# Altium PCB Tray2.PcbDoc (part 1 of 6)
Units mil, origin at the board's own origin, x right, y up, seen from the top; angles counter-clockwise.
Board outline 6000 x 4000 mil, 2 copper layers (Top Layer, Bottom Layer); 418 components, 415 nets, 1799 pads, 870 vias.
Unrouted connection lines stored in the file: 363.
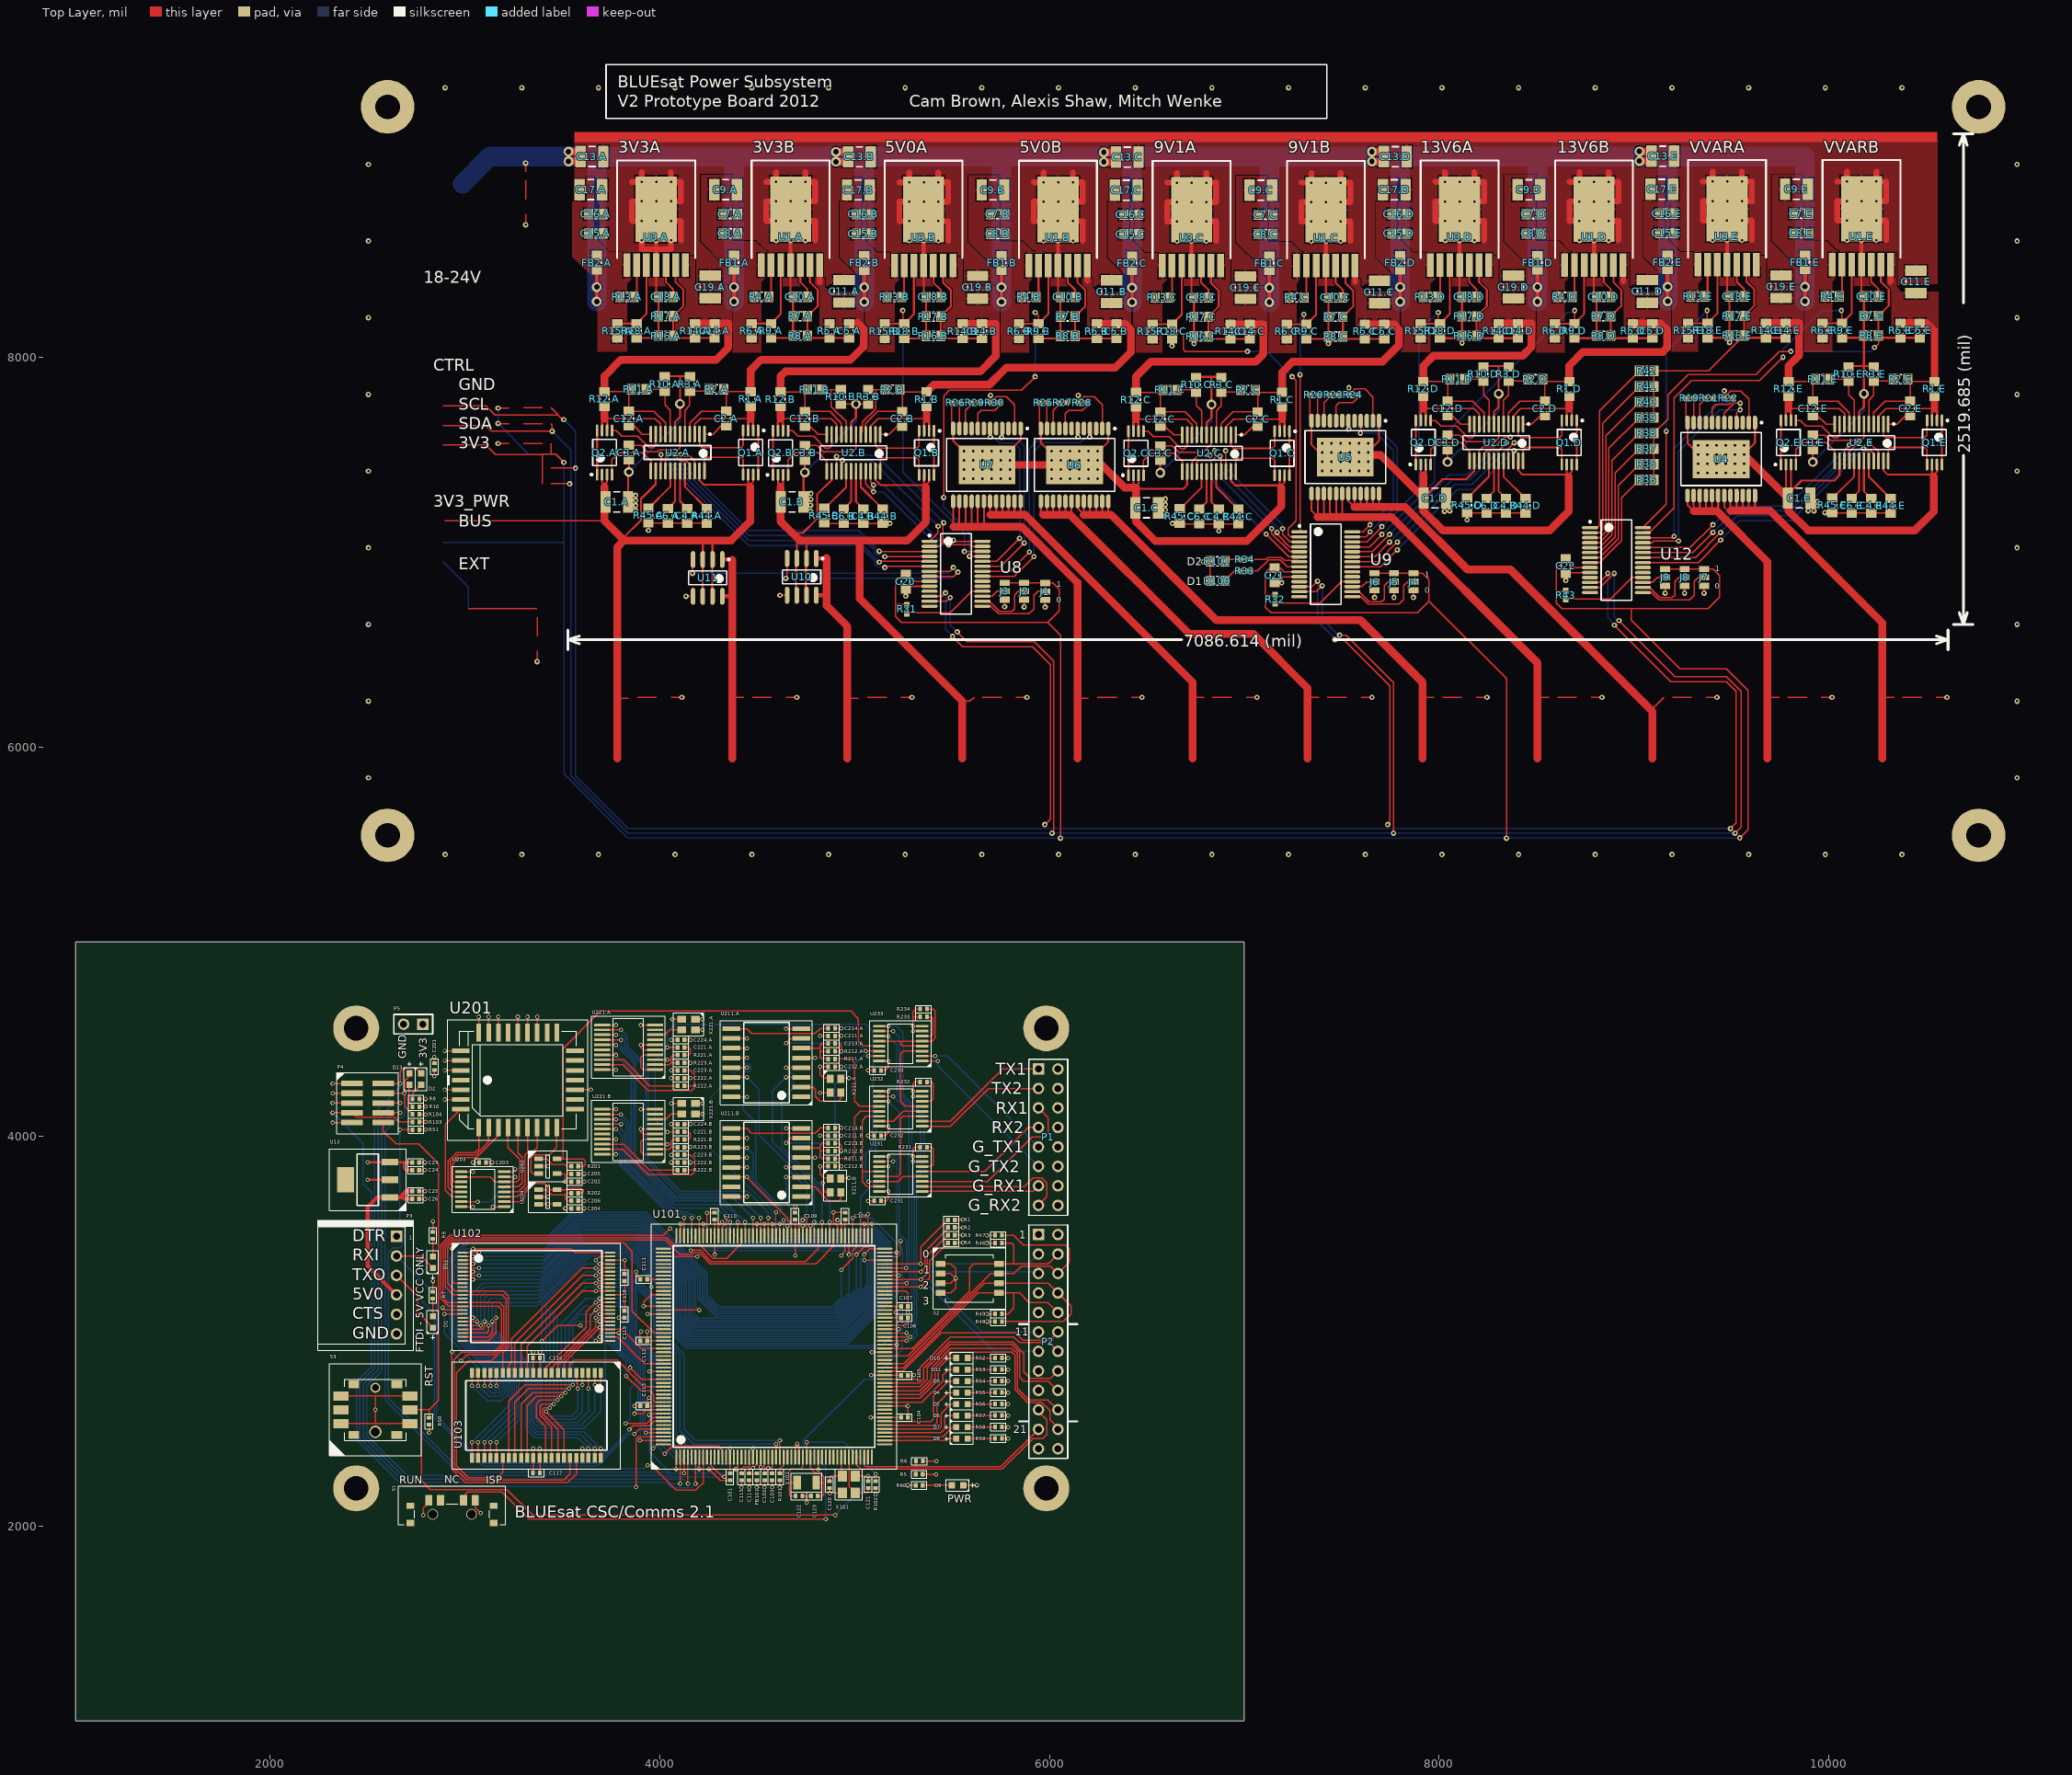
[diagram p0: Top Layer view]
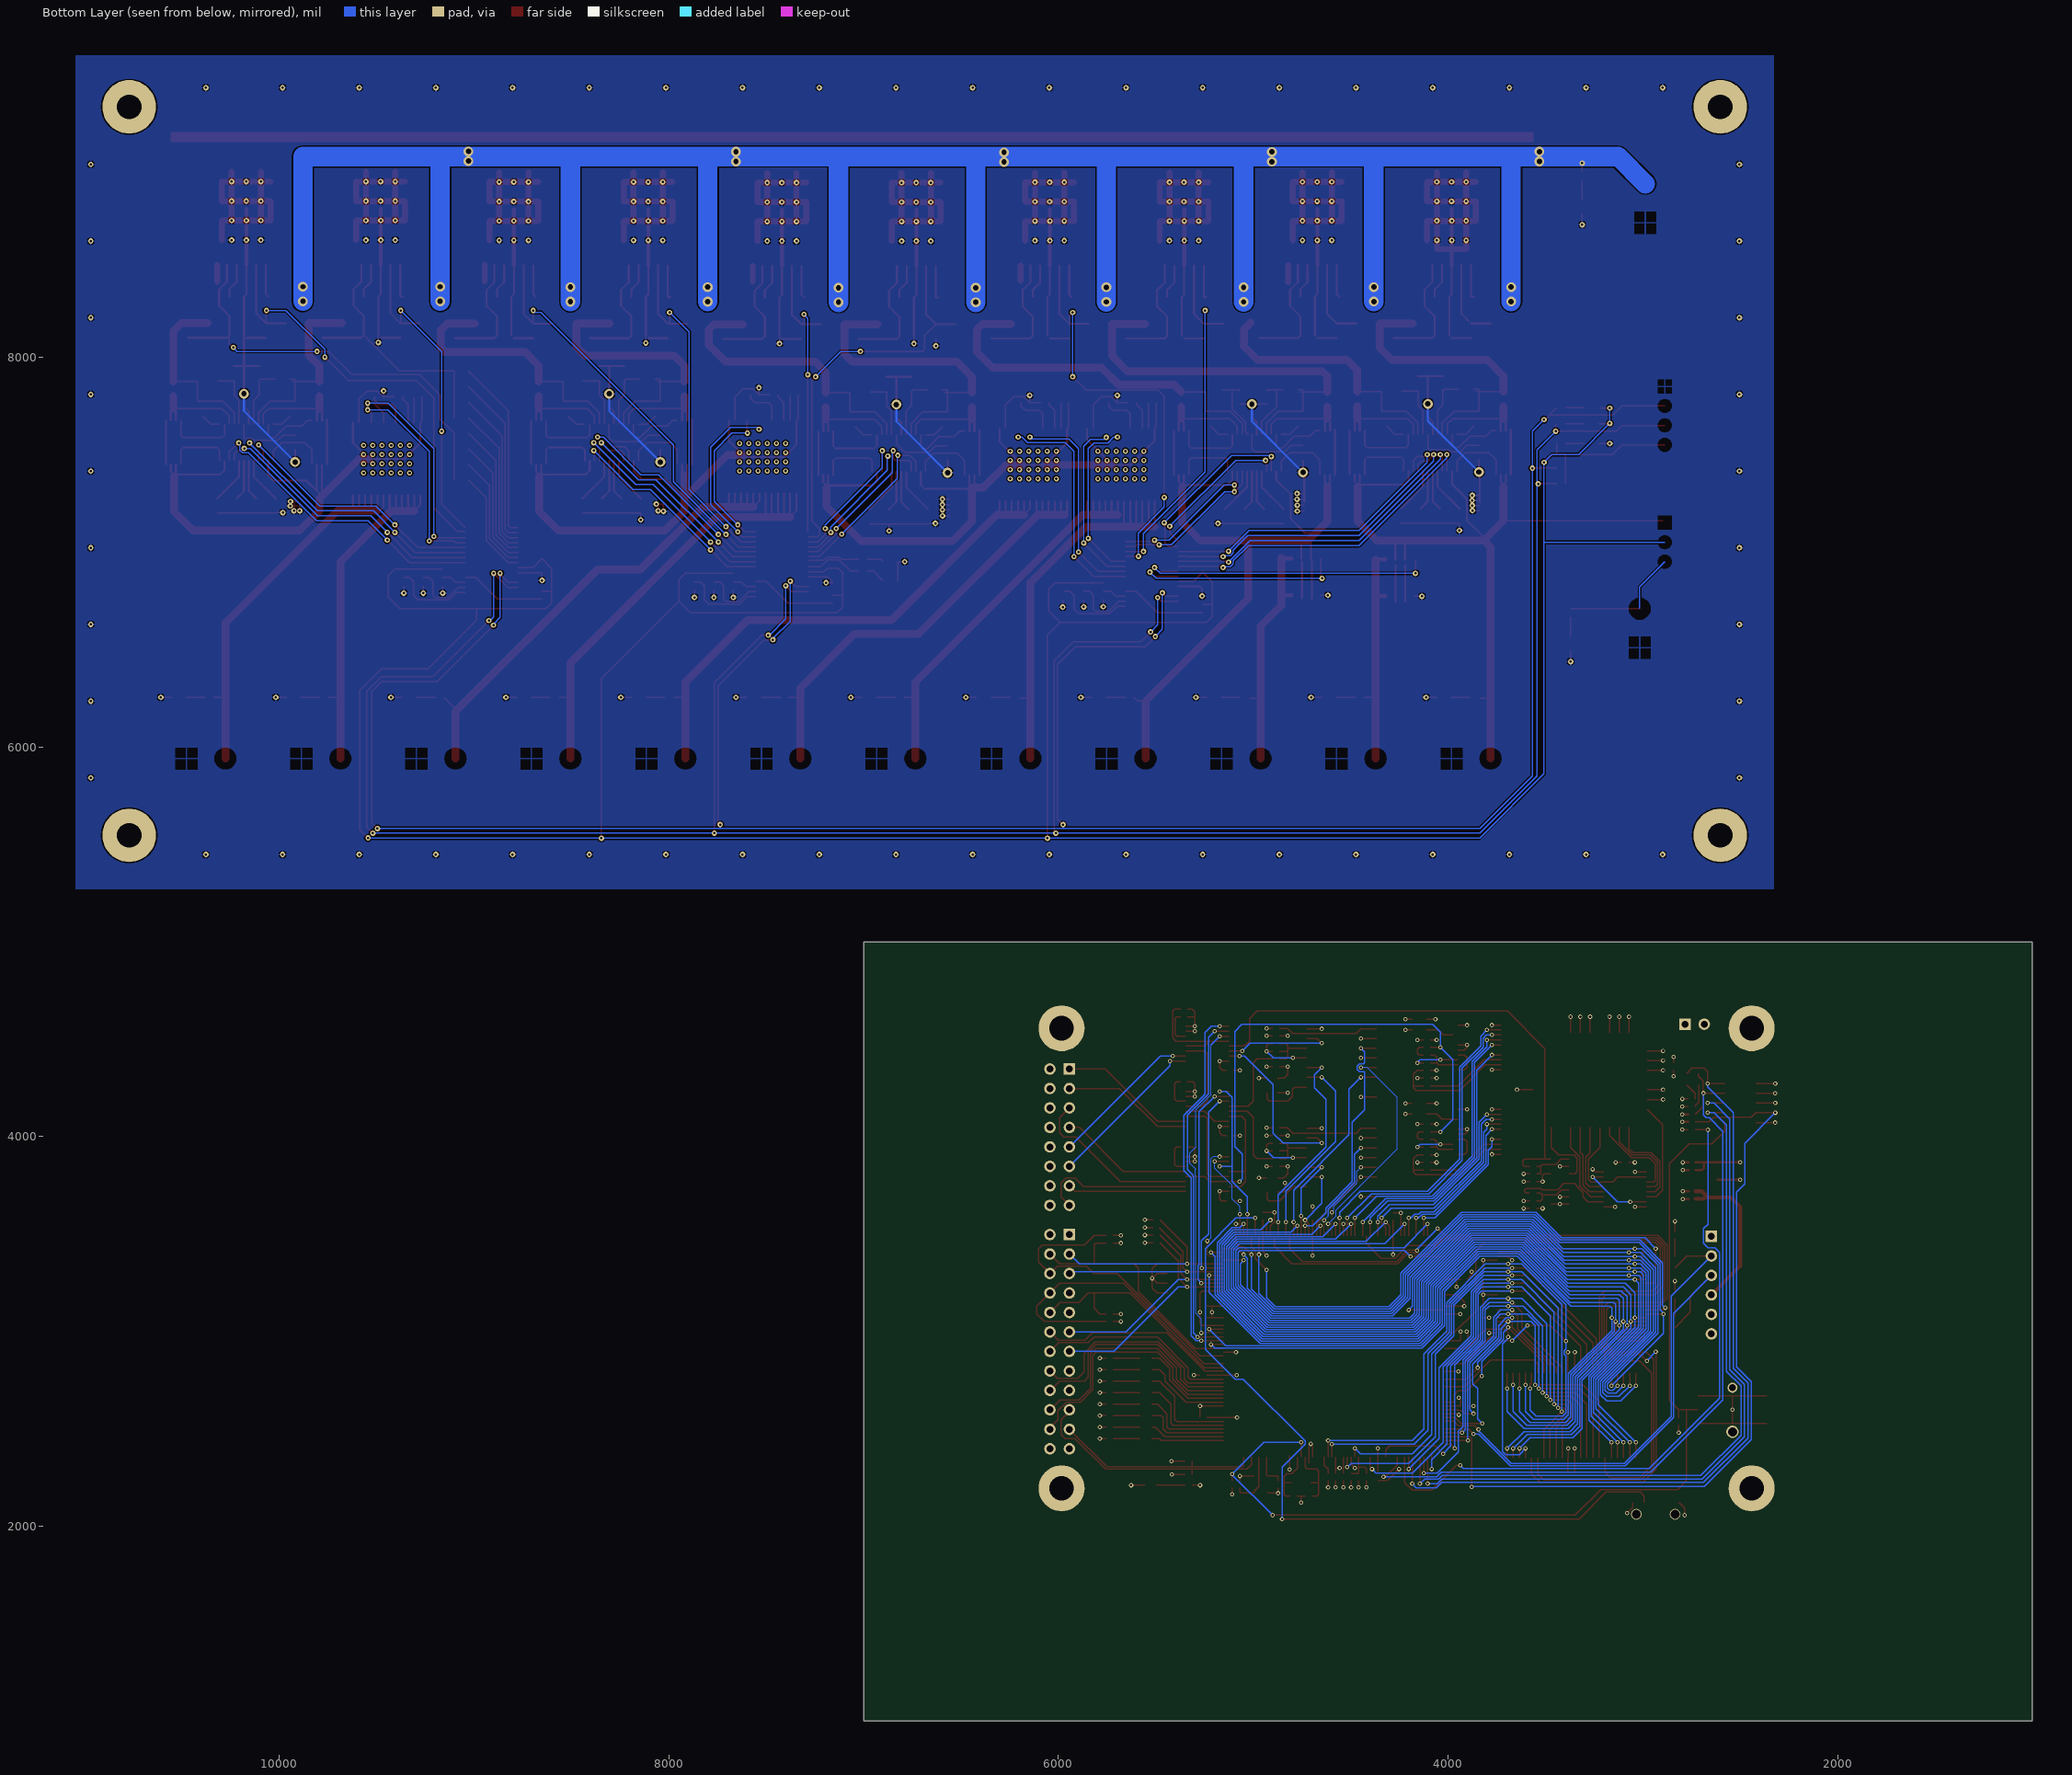
[diagram p1: Bottom Layer view, seen from below]

## Layer stack, top to bottom
Top Layer: signal copper 1.4
Dielectric: dielectric 12.6, FR-4, Dk 4.8
Bottom Layer: signal copper 1.4

## Board outline
1000,1000 7000,1000 7000,5000 1000,5000

## Design rules (kind name [scope] priority, off if disabled: settings)
Clearance [All] p1: gap=10
PolygonConnect [All] p1: connectstyle=Relief reliefconductorwidth=10 reliefentries=4 polygonreliefangle="90 Angle" airgapwidth=10
RoutingVias [All] p1: holewidth=28 width=50 viastyle="Through Hole" minholewidth=28 minwidth=50 maxholewidth=28 maxwidth=50
SilkscreenOverComponentPads [All] p1: minsilkscreentomaskgap=10
SolderMaskExpansion [All] p1: expansion=4
Width [All] p1: maxlimit=10 minlimit=10 preferedwidth=10
27 further rules are at their usual default settings.

## Classes and differential pairs
channel class Tray2_Power_RedundantReg: 3V3 5V0 9V1 13V6 VVAR
channel class Tray2_Comms_DTMF: DTMF1 DTMF2
channel class Tray2_Comms_AFSK: AFSK1 AFSK2
net class LED[0..7]: LED0 LED1 LED2 LED3 LED4 LED5 LED6 LED7
net class EXT[0..9]: EXT0 EXT1 EXT2 EXT3 EXT4 EXT5 EXT6 EXT7 EXT8 EXT9
net class D[0..15]: D0 D1 D2 D3 D4 D5 D6 D7 D8 D9 D10 D11 D12 D13 D14 D15
net class CONTROL.SWC[0..7]: CONTROL.SWC0 CONTROL.SWC1 CONTROL.SWC2 CONTROL.SWC3 CONTROL.SWC4 CONTROL.SWC5 CONTROL.SWC6 CONTROL.SWC7
net class CONTROL.DTMF2.Q[1..4]: CONTROL.DTMF2.Q1 CONTROL.DTMF2.Q2 CONTROL.DTMF2.Q3 CONTROL.DTMF2.Q4
net class CONTROL.DTMF1.Q[1..4]: CONTROL.DTMF1.Q1 CONTROL.DTMF1.Q2 CONTROL.DTMF1.Q3 CONTROL.DTMF1.Q4
net class ADDRESS[0..7]: ADDRESS0 ADDRESS1 ADDRESS2 ADDRESS3 ADDRESS4 ADDRESS5 ADDRESS6 ADDRESS7
net class A[0..19]: A0 A1 A2 A3 A4 A5 A6 A7 A8 A9 A10 A11 A12 A13 A14 A15 A16 A17 A18 A19
component class VVAR: C1.E C2.E C3.E C4.E C5.E C6.E C7.E C8.E C9.E C10.E C11.E C12.E C13.E C14.E C15.E C16.E C17.E C18.E C19.E FB1.E FB2.E Q1.E Q2.E R1.E R2.E R3.E R4.E R5.E R6.E R7.E R8.E R9.E R10.E R11.E R12.E R13.E R14.E R15.E R16.E R17.E R18.E R44.E R45.E U1.E U2.E U3.E
component class SwC: C231 C232 C233 R231 R232 R233 R234 U231 U232 U233
component class Regulation: C20 C21 C22 D100 D101 J1 J2 J3 J4 J5 J6 J7 J8 J9 R19 R20 R21 R22 R23 R24 R25 R26 R27 R28 R29 R30 R31 R32 R33 R34 R35 R36 R37 R38 R39 R40 R41 R42 R43 U4 U5 U6 U7 U8 U9 U10 U11 U12
component class DTMF2: C221.B C222.B C223.B C224.B R221.B R222.B R223.B U221.B X221.B
component class DTMF1: C221.A C222.A C223.A C224.A R221.A R222.A R223.A U221.A X221.A
component class "Connections Temp": C23 C24 C25 C26 D1 D2 D3 D4 D5 D6 D7 D8 D9 D10 D11 D12 D13 P1 P2 P3 P4 P5 R1 R2 R3 R4 R5 R6 R7 R8 R9 R10 R46 R47 R48 R49 R50 R51 R52 R53 R54 R55 R56 R57 R58 R59 R60 S1 S2 S3 U13
component class Beacon: C201 C202 C203 C204 C205 C206 R201 R202 U201 U202 U203 U204
component class ARM: C101 C102 C103 C104 C105 C106 C107 C108 C109 C110 C111 C112 C113 C114 C115 C116 C117 C118 C119 C120 C121 C122 C123 FB101 R101 R102 R103 R104 U101 U102 U103 X101 X102
component class AFSK2: C211.B C212.B C213.B C214.B R211.B R212.B U211.B X211.B
component class AFSK1: C211.A C212.A C213.A C214.A R211.A R212.A U211.A X211.A
component class 13V6: C1.D C2.D C3.D C4.D C5.D C6.D C7.D C8.D C9.D C10.D C11.D C12.D C13.D C14.D C15.D C16.D C17.D C18.D C19.D FB1.D FB2.D Q1.D Q2.D R1.D R2.D R3.D R4.D R5.D R6.D R7.D R8.D R9.D R10.D R11.D R12.D R13.D R14.D R15.D R16.D R17.D R18.D R44.D R45.D U1.D U2.D U3.D
component class 9V1: C1.C C2.C C3.C C4.C C5.C C6.C C7.C C8.C C9.C C10.C C11.C C12.C C13.C C14.C C15.C C16.C C17.C C18.C C19.C FB1.C FB2.C Q1.C Q2.C R1.C R2.C R3.C R4.C R5.C R6.C R7.C R8.C R9.C R10.C R11.C R12.C R13.C R14.C R15.C R16.C R17.C R18.C R44.C R45.C U1.C U2.C U3.C
component class 5V0: C1.B C2.B C3.B C4.B C5.B C6.B C7.B C8.B C9.B C10.B C11.B C12.B C13.B C14.B C15.B C16.B C17.B C18.B C19.B FB1.B FB2.B Q1.B Q2.B R1.B R2.B R3.B R4.B R5.B R6.B R7.B R8.B R9.B R10.B R11.B R12.B R13.B R14.B R15.B R16.B R17.B R18.B R44.B R45.B U1.B U2.B U3.B
component class 3V3: C1.A C2.A C3.A C4.A C5.A C6.A C7.A C8.A C9.A C10.A C11.A C12.A C13.A C14.A C15.A C16.A C17.A C18.A C19.A FB1.A FB2.A Q1.A Q2.A R1.A R2.A R3.A R4.A R5.A R6.A R7.A R8.A R9.A R10.A R11.A R12.A R13.A R14.A R15.A R16.A R17.A R18.A R44.A R45.A U1.A U2.A U3.A

## Components (designator, comment, footprint, x,y, rotation, side; value= is the part's Value field where it differs from the comment)
C1.A "COUT2" R1210M 3779.69,7258.7 r180 top (schematic designator C1)
C1.B "COUT2" R1210M 4679.69,7258.7 r180 top (schematic designator C1)
C1.C "COUT2" R1210M 6499.69,7228.7 r180 top (schematic designator C1)
C1.D "COUT2" R1210M 7979.69,7278.7 r180 top (schematic designator C1)
C1.E "COUT2" R1210M 9849.69,7278.7 r180 top (schematic designator C1)
C2.A "" R0805M 4341.18,7687.13 r270 top (schematic designator C2)
C2.B "" R0805M 5244.53,7685.63 r270 top (schematic designator C2)
C2.C "" R0805M 7069.76,7683.7 r270 top (schematic designator C2)
C2.D "" R0805M 8544.68,7738.7 r270 top (schematic designator C2)
C2.E "" R0805M 10419.76,7738.7 r270 top (schematic designator C2)
C3.A "" R0805M 3841.18,7512.13 r270 top (schematic designator C3)
C3.B "" R0805M 4744.53,7510.63 r270 top (schematic designator C3)
C3.C "" R0805M 6569.76,7508.7 r270 top (schematic designator C3)
C3.D "" R0805M 8044.68,7563.7 r270 top (schematic designator C3)
C3.E "" R0805M 9919.76,7563.7 r270 top (schematic designator C3)
C4.A "" R0805M 4141.18,7187.13 r90 top (schematic designator C4)
C4.B "" R0805M 5044.53,7185.63 r90 top (schematic designator C4)
C4.C "" R0805M 6869.76,7183.7 r90 top (schematic designator C4)
C4.D "" R0805M 8344.68,7238.7 r90 top (schematic designator C4)
C4.E "" R0805M 10219.76,7238.7 r90 top (schematic designator C4)
C5.A "CFF" R0805M 4971.18,8137.13 r90 top (schematic designator C5)
C5.B "CFF" R0805M 6344.53,8135.63 r90 top (schematic designator C5)
C5.C "CFF" R0805M 7719.76,8133.7 r90 top (schematic designator C5)
C5.D "CFF" R0805M 9096.14,8136.77 r90 top (schematic designator C5)
C5.E "CFF" R0805M 10469.76,8138.7 r90 top (schematic designator C5)
C6.A "" R0805M 4041.18,7187.13 r90 top (schematic designator C6)
C6.B "" R0805M 4944.53,7185.63 r90 top (schematic designator C6)
C6.C "" R0805M 6769.76,7183.7 r90 top (schematic designator C6)
C6.D "" R0805M 8244.68,7238.7 r90 top (schematic designator C6)
C6.E "" R0805M 10119.76,7238.7 r90 top (schematic designator C6)
C7.A "CIN" R0805M 4361.18,8737.13 r180 top (schematic designator C7)
C7.B "CIN" R0805M 5734.53,8735.63 r180 top (schematic designator C7)
C7.C "CIN" R0805M 7109.76,8733.7 r180 top (schematic designator C7)
C7.D "CIN" R0805M 8486.14,8736.77 r180 top (schematic designator C7)
C7.E "CIN" R0805M 9859.76,8738.7 r180 top (schematic designator C7)
C8.A "CIN" R0805M 4361.18,8637.13 r180 top (schematic designator C8)
C8.B "CIN" R0805M 5734.53,8635.63 r180 top (schematic designator C8)
C8.C "CIN" R0805M 7109.76,8633.7 r180 top (schematic designator C8)
C8.D "CIN" R0805M 8486.14,8636.77 r180 top (schematic designator C8)
C8.E "CIN" R0805M 9859.76,8638.7 r180 top (schematic designator C8)
C9.A "CIN" R1210M 4337.56,8862.13 r0 top (schematic designator C9)
C9.B "CIN" R1210M 5710.91,8860.63 r0 top (schematic designator C9)
C9.C "CIN" R1210M 7086.14,8858.7 r0 top (schematic designator C9)
C9.D "CIN" R1210M 8462.52,8861.77 r0 top (schematic designator C9)
C9.E "CIN" R1210M 9836.14,8863.7 r0 top (schematic designator C9)
C10.A "CSS" R0805M 4721.18,8312.13 r180 top (schematic designator C10)
C10.B "CSS" R0805M 6094.53,8310.63 r180 top (schematic designator C10)
C10.C "CSS" R0805M 7469.76,8308.7 r180 top (schematic designator C10)
C10.D "CSS" R0805M 8846.14,8311.77 r180 top (schematic designator C10)
C10.E "CSS" R0805M 10219.76,8313.7 r180 top (schematic designator C10)
C11.A "COUT" R1210M 4946.18,8339.72 r270 top (schematic designator C11)
C11.B "COUT" R1210M 6319.53,8338.23 r270 top (schematic designator C11)
C11.C "COUT" R1210M 7694.76,8336.3 r270 top (schematic designator C11)
C11.D "COUT" R1210M 9071.14,8339.37 r270 top (schematic designator C11)
C11.E "COUT" R1210M 10449.69,8388.7 r270 top (schematic designator C11)
C12.A "" R0805M 3841.18,7687.13 r90 top (schematic designator C12)
C12.B "" R0805M 4744.53,7685.63 r90 top (schematic designator C12)
C12.C "" R0805M 6569.76,7683.7 r90 top (schematic designator C12)
C12.D "" R0805M 8044.68,7738.7 r90 top (schematic designator C12)
C12.E "" R0805M 9919.76,7738.7 r90 top (schematic designator C12)
C13.A "" R1210M 3651.18,9032.13 r0 top (schematic designator C13)
C13.B "" R1210M 5024.53,9030.63 r0 top (schematic designator C13)
C13.C "" R1210M 6399.76,9028.7 r0 top (schematic designator C13)
C13.D "" R1210M 7776.14,9031.77 r0 top (schematic designator C13)
C13.E "" R1210M 9149.76,9033.7 r0 top (schematic designator C13)
C14.A "CFF" R0805M 4281.18,8137.13 r90 top (schematic designator C14)
C14.B "CFF" R0805M 5654.53,8135.63 r90 top (schematic designator C14)
C14.C "CFF" R0805M 7029.76,8133.7 r90 top (schematic designator C14)
C14.D "CFF" R0805M 8406.14,8136.77 r90 top (schematic designator C14)
C14.E "CFF" R0805M 9779.76,8138.7 r90 top (schematic designator C14)
C15.A "CIN" R0805M 3671.18,8637.13 r180 top (schematic designator C15)
C15.B "CIN" R0805M 5044.53,8635.63 r180 top (schematic designator C15)
C15.C "CIN" R0805M 6419.76,8633.7 r180 top (schematic designator C15)
C15.D "CIN" R0805M 7796.14,8636.77 r180 top (schematic designator C15)
C15.E "CIN" R0805M 9169.76,8638.7 r180 top (schematic designator C15)
C16.A "CIN" R0805M 3671.18,8737.13 r180 top (schematic designator C16)
C16.B "CIN" R0805M 5044.53,8735.63 r180 top (schematic designator C16)
C16.C "CIN" R0805M 6419.76,8733.7 r180 top (schematic designator C16)
C16.D "CIN" R0805M 7796.14,8736.77 r180 top (schematic designator C16)
C16.E "CIN" R0805M 9169.76,8738.7 r180 top (schematic designator C16)
C17.A "CIN" R1210M 3646.18,8862.13 r0 top (schematic designator C17)
C17.B "CIN" R1210M 5019.53,8860.63 r0 top (schematic designator C17)
C17.C "CIN" R1210M 6394.76,8858.7 r0 top (schematic designator C17)
C17.D "CIN" R1210M 7771.14,8861.77 r0 top (schematic designator C17)
C17.E "CIN" R1210M 9144.76,8863.7 r0 top (schematic designator C17)
C18.A "CSS" R0805M 4031.18,8312.13 r180 top (schematic designator C18)
C18.B "CSS" R0805M 5404.53,8310.63 r180 top (schematic designator C18)
C18.C "CSS" R0805M 6779.76,8308.7 r180 top (schematic designator C18)
C18.D "CSS" R0805M 8156.14,8311.77 r180 top (schematic designator C18)
C18.E "CSS" R0805M 9529.76,8313.7 r180 top (schematic designator C18)
C19.A "COUT" R1210M 4258.11,8362.13 r270 top (schematic designator C19)
C19.B "COUT" R1210M 5631.46,8360.63 r270 top (schematic designator C19)
C19.C "COUT" R1210M 7006.69,8358.7 r270 top (schematic designator C19)
C19.D "COUT" R1210M 8383.07,8361.77 r270 top (schematic designator C19)
C19.E "COUT" R1210M 9756.69,8363.7 r270 top (schematic designator C19)
C20 "" R0805M 5262.91,6849.65 r270 top
C21 "" R0805M 7157.01,6881.69 r270 top
C22 "" R0805M 8651.82,6930.12 r270 top
C23 "Cap 0402" CAPC1005X06L 2746.14,3867.24 r180 top
C24 "Cap 0402" CAPC1005X06L 2746.14,3827.87 r180 top
C25 "Cap 0402" CAPC1005X06L 2746.14,3719.61 r180 top
C26 "Cap 0402" CAPC1005X06L 2746.14,3680.24 r180 top
C101 "Cap 0402" CAPC1005X06L 4360.31,2253.07 r90 top
C102 "Cap 0402" CAPC1005X06L 4537.48,2253.07 r90 top
C103 "Cap 0402" CAPC1005X06L 4576.85,2253.07 r90 top
C104 "Cap 0402" CAPC1005X06L 5255.98,2558.19 r180 top
C105 "Cap 0402" CAPC1005X06L 5255.98,2774.72 r180 top
C106 "Cap 0402" CAPC1005X06L 5255.98,3070 r180 top
C107 "Cap 0402" CAPC1005X06L 5255.98,3129.06 r180 top
C108 "Cap 0402" CAPC1005X06L 4950.87,3591.65 r270 top
C109 "Cap 0402" CAPC1005X06L 4694.96,3591.65 r270 top
C110 "Cap 0402" CAPC1005X06L 4281.57,3591.65 r270 top
C111 "Cap 0402" CAPC1005X06L 3917.4,3266.85 r0 top
C112 "Cap 0402" CAPC1005X06L 3917.4,2951.89 r0 top
C113 "Cap 0402" CAPC1005X06L 3917.4,2617.24 r0 top
C114 "Cap 0402" CAPC1005X06L 4458.74,2253.07 r90 top
C115 "Cap 0402" CAPC1005X06L 4419.37,2253.07 r90 top
C116 "Cap 0402" CAPC1005X06L 3366.22,2863.31 r0 top
C117 "Cap 0402" CAPC1005X06L 3366.22,2272.76 r180 top
C118 "Cap 0402" CAPC1005X06L 3818.98,3276.69 r270 top
C119 "Cap 0402" CAPC1005X06L 3818.98,3087.72 r90 top
C120 "Cap 0402" CAPC1005X06L 4872.13,2213.7 r270 top
C121 "Cap 0402" CAPC1005X06L 5068.98,2213.7 r270 top
C122 "Cap 0402" CAPC1005X06L 4714.65,2154.65 r0 top
C123 "Cap 0402" CAPC1005X06L 4793.39,2154.65 r0 top
C201 "Cap 0402" CAPC1005X06L 2842.6,4359.37 r90 top
C202 "Cap 0402" CAPC1005X06L 3563.07,3768.82 r0 top
C203 "Cap 0402" CAPC1005X06L 3090.63,3867.24 r0 top
C204 "Cap 0402" CAPC1005X06L 3563.07,3631.02 r180 top
C205 "Cap 0402" CAPC1005X06L 3563.07,3808.19 r180 top
C206 "Cap 0402" CAPC1005X06L 3563.07,3670.39 r180 top
C211.A "Cap 0402" CAPC1005X06L 4881.97,4516.85 r180 top (schematic designator C211)
C211.B "Cap 0402" CAPC1005X06L 4881.97,4005.04 r180 top (schematic designator C211)
C212.A "Cap 0402" CAPC1005X06L 4881.97,4359.37 r180 top (schematic designator C212)
C212.B "Cap 0402" CAPC1005X06L 4881.97,3847.56 r180 top (schematic designator C212)
C213.A "Cap 0402" CAPC1005X06L 4881.97,4477.48 r180 top (schematic designator C213)
C213.B "Cap 0402" CAPC1005X06L 4881.97,3965.67 r180 top (schematic designator C213)
C214.A "Cap 0402" CAPC1005X06L 4881.97,4556.22 r180 top (schematic designator C214)
C214.B "Cap 0402" CAPC1005X06L 4881.97,4044.41 r180 top (schematic designator C214)
C221.A "Cap 0402" CAPC1005X06L 4108.35,4457.8 r180 top (schematic designator C221)
C221.B "Cap 0402" CAPC1005X06L 4108.35,4024.72 r180 top (schematic designator C221)
C222.A "Cap 0402" CAPC1005X06L 4108.35,4300.32 r180 top (schematic designator C222)
C222.B "Cap 0402" CAPC1005X06L 4108.35,3867.24 r180 top (schematic designator C222)
C223.A "Cap 0402" CAPC1005X06L 4108.35,4339.69 r0 top (schematic designator C223)
C223.B "Cap 0402" CAPC1005X06L 4108.35,3906.61 r0 top (schematic designator C223)
C224.A "Cap 0402" CAPC1005X06L 4108.35,4497.17 r180 top (schematic designator C224)
C224.B "Cap 0402" CAPC1005X06L 4108.35,4064.09 r180 top (schematic designator C224)
C231 "Cap 0402" CAPC1005X06L 5118.19,3670.39 r0 top
C232 "Cap 0402" CAPC1005X06L 5118.19,4005.04 r0 top
C233 "Cap 0402" CAPC1005X06L 5118.19,4339.69 r0 top
D1 "LED - ASMT-Rx45" ASMT-Rx45 2834.72,3048.35 r90 top
D2 "LED - ASMT-Rx45" ASMT-Rx45 2774.68,4295.39 r270 top
D3 "LED - ASMT-Rx45" ASMT-Rx45 5551.26,2745.2 r0 top
D4 "LED - ASMT-Rx45" ASMT-Rx45 5551.26,2686.14 r0 top
D5 "LED - ASMT-Rx45" ASMT-Rx45 5551.26,2627.09 r0 top
D6 "LED - ASMT-Rx45" ASMT-Rx45 5551.26,2568.03 r0 top
D7 "LED - ASMT-Rx45" ASMT-Rx45 5551.26,2508.98 r0 top
D8 "LED - ASMT-Rx45" ASMT-Rx45 5551.26,2449.92 r0 top
D9 "LED - ASMT-Rx45" ASMT-Rx45 5528.62,2209.76 r180 top
D10 "LED - ASMT-Rx45" ASMT-Rx45 5551.26,2863.31 r0 top
D11 "LED - ASMT-Rx45" ASMT-Rx45 5551.26,2804.25 r0 top
D12 "LED - ASMT-Rx45" ASMT-Rx45 2834.72,3355.43 r90 top
D13 "LED - ASMT-Rx45" ASMT-Rx45 2714.65,4295.39 r270 top
D100 "LED0" R0805M 6863.39,6853.74 r180 top
D101 "LED0" R0805M 6863.39,6953.74 r180 top
FB1.A "" R0805M 4381.18,8487.13 r270 top (schematic designator FB1)
FB1.B "" R0805M 5754.53,8485.63 r270 top (schematic designator FB1)
FB1.C "" R0805M 7129.76,8483.7 r270 top (schematic designator FB1)
FB1.D "" R0805M 8506.14,8486.77 r270 top (schematic designator FB1)
FB1.E "" R0805M 9879.76,8488.7 r270 top (schematic designator FB1)
FB2.A "" R0805M 3676.18,8487.13 r270 top (schematic designator FB2)
FB2.B "" R0805M 5049.53,8485.63 r270 top (schematic designator FB2)
FB2.C "" R0805M 6424.76,8483.7 r270 top (schematic designator FB2)
FB2.D "" R0805M 7801.14,8486.77 r270 top (schematic designator FB2)
FB2.E "" R0805M 9174.76,8488.7 r270 top (schematic designator FB2)
FB101 "Ferite Bead 0402" INDC1005X06L 4498.11,2253.07 r90 top
J1 "3-WAY JUMPER" J1205M 5978.5,6798.07 r270 top
J2 "3-WAY JUMPER" J1205M 5870.63,6799.99 r270 top
J3 "3-WAY JUMPER" J1205M 5770.63,6799.99 r270 top
J4 "3-WAY JUMPER" J1205M 7869.45,6848.7 r270 top
J5 "3-WAY JUMPER" J1205M 7769.45,6848.7 r270 top
J6 "3-WAY JUMPER" J1205M 7669.45,6848.7 r270 top
J7 "3-WAY JUMPER" J1205M 9361.82,6870.47 r270 top
J8 "3-WAY JUMPER" J1205M 9261.82,6870.47 r270 top
J9 "3-WAY JUMPER" J1205M 9161.82,6870.47 r270 top
P1 "Header 8X2" HDR2X8 5944.17,4347.17 r270 top
P2 "Header 12X2" HDR2X12 5944.17,3497.17 r270 top
P3 "FTDI Basic" "FTDI BASIC" 2244.17,3237.32 r0 top
P4 "Cortex Debug Connector" FTSH-105-01-L-DV-TR 2500.08,4172.36 r270 top
P5 "Header 2" HDR1X2 2784.17,4577.17 r180 top
Q1.A "IRF8852" TSSOP8 4466.18,7512.13 r270 top (schematic designator Q1)
Q1.B "IRF8852" TSSOP8 5369.53,7510.63 r270 top (schematic designator Q1)
Q1.C "IRF8852" TSSOP8 7194.76,7508.7 r270 top (schematic designator Q1)
Q1.D "IRF8852" TSSOP8 8669.68,7563.7 r270 top (schematic designator Q1)
Q1.E "IRF8852" TSSOP8 10544.76,7563.7 r270 top (schematic designator Q1)
Q2.A "IRF8852" TSSOP8 3716.18,7512.13 r90 top (schematic designator Q2)
Q2.B "IRF8852" TSSOP8 4619.53,7510.63 r90 top (schematic designator Q2)
Q2.C "IRF8852" TSSOP8 6444.76,7508.7 r90 top (schematic designator Q2)
Q2.D "IRF8852" TSSOP8 7919.68,7563.7 r90 top (schematic designator Q2)
Q2.E "IRF8852" TSSOP8 9794.76,7563.7 r90 top (schematic designator Q2)
R1 "Res3" RESC1005X06L 5497.13,3572.95 r0 top
R1.A "ISENSE" R0805M 4466.18,7787.13 r270 top (schematic designator R1)
R1.B "ISENSE" R0805M 5369.53,7785.63 r270 top (schematic designator R1)
R1.C "ISENSE" R0805M 7194.76,7783.7 r270 top (schematic designator R1)
R1.D "ISENSE" R0805M 8669.68,7838.7 r270 top (schematic designator R1)
R1.E "ISENSE" R0805M 10544.76,7838.7 r270 top (schematic designator R1)
R2 "Res3" RESC1005X06L 5497.13,3533.58 r0 top
R2.A "ON1" R0805M 4291.18,7837.13 r180 top (schematic designator R2)
R2.B "ON1" R0805M 5194.53,7835.63 r180 top (schematic designator R2)
R2.C "ON1" R0805M 7019.76,7833.7 r180 top (schematic designator R2)
R2.D "ON1" R0805M 8494.68,7888.7 r180 top (schematic designator R2)
R2.E "ON1" R0805M 10369.76,7888.7 r180 top (schematic designator R2)
R3 "Res3" RESC1005X06L 5497.13,3494.21 r0 top
R3.A "ON2" R0805M 4154.69,7863.7 r270 top (schematic designator R3)
R3.B "ON2" R0805M 5069.69,7798.7 r90 top (schematic designator R3)
R3.C "ON2" R0805M 6883.27,7860.28 r270 top (schematic designator R3)
R3.D "ON2" R0805M 8358.19,7915.27 r270 top (schematic designator R3)
R3.E "ON2" R0805M 10233.27,7915.28 r270 top (schematic designator R3)
R4 "Res3" RESC1005X06L 5497.13,3454.84 r0 top
R4.A "RON" R0805M 4521.18,8312.13 r180 top (schematic designator R4)
R4.B "RON" R0805M 5894.53,8310.63 r180 top (schematic designator R4)
R4.C "RON" R0805M 7269.76,8308.7 r180 top (schematic designator R4)
R4.D "RON" R0805M 8646.14,8311.77 r180 top (schematic designator R4)
R4.E "RON" R0805M 10019.76,8313.7 r180 top (schematic designator R4)
R5 "Res3" RESC1005X06L 5331.77,2265.87 r0 top
R5.A "RFBT" R0805M 4871.18,8137.13 r90 top (schematic designator R5)
R5.B "RFBT" R0805M 6244.53,8135.63 r90 top (schematic designator R5)
R5.C "RFBT" R0805M 7619.76,8133.7 r90 top (schematic designator R5)
R5.D "RFBT" R0805M 8996.14,8136.77 r90 top (schematic designator R5)
R5.E "RFBT" R0805M 10369.76,8138.7 r90 top (schematic designator R5)
R6 "Res3" RESC1005X06L 5332.76,2333.78 r0 top
R6.A "RENT" R0805M 4471.18,8137.13 r90 top (schematic designator R6)
R6.B "RENT" R0805M 5844.53,8135.63 r90 top (schematic designator R6)
R6.C "RENT" R0805M 7219.76,8133.7 r90 top (schematic designator R6)
R6.D "RENT" R0805M 8596.14,8136.77 r90 top (schematic designator R6)
R6.E "RENT" R0805M 9969.76,8138.7 r90 top (schematic designator R6)
R7 "Res3" RESC1005X06L 2834.72,3186.14 r90 top
R7.A "RFBB" R0805M 4721.18,8212.13 r0 top (schematic designator R7)
R7.B "RFBB" R0805M 6094.53,8210.63 r0 top (schematic designator R7)
R7.C "RFBB" R0805M 7469.77,8208.7 r0 top (schematic designator R7)
R7.D "RFBB" R0805M 8846.14,8211.77 r0 top (schematic designator R7)
R7.E "RFBB" R0805M 10219.77,8213.7 r0 top (schematic designator R7)
R8 "Res3" RESC1005X06L 2748.11,4193.03 r0 top
R8.A "RFBB" R0805M 4721.18,8112.13 r0 top (schematic designator R8)
R8.B "RFBB" R0805M 6094.53,8110.63 r0 top (schematic designator R8)
R8.C "RFBB" R0805M 7469.77,8108.7 r0 top (schematic designator R8)
R8.D "RFBB" R0805M 8846.14,8111.77 r0 top (schematic designator R8)
R8.E "RFBB" R0805M 10219.77,8113.7 r0 top (schematic designator R8)
R9 "Res3" RESC1005X06L 2834.72,3493.23 r90 top
R9.A "RENB" R0805M 4571.18,8137.13 r270 top (schematic designator R9)
R9.B "RENB" R0805M 5944.53,8135.63 r270 top (schematic designator R9)
R9.C "RENB" R0805M 7319.76,8133.7 r270 top (schematic designator R9)
R9.D "RENB" R0805M 8696.14,8136.77 r270 top (schematic designator R9)
R9.E "RENB" R0805M 10069.76,8138.7 r270 top (schematic designator R9)
R10 "Res3" RESC1005X06L 2748.11,4153.66 r0 top
R10.A "ON2" R0805M 4024.69,7863.7 r270 top (schematic designator R10)
R10.B "ON2" R0805M 4929.53,7798.7 r90 top (schematic designator R10)
R10.C "ON2" R0805M 6753.27,7860.28 r270 top (schematic designator R10)
R10.D "ON2" R0805M 8228.19,7915.27 r270 top (schematic designator R10)
R10.E "ON2" R0805M 10103.27,7915.28 r270 top (schematic designator R10)
R11.A "ON1" R0805M 3891.18,7837.13 r0 top (schematic designator R11)
R11.B "ON1" R0805M 4794.53,7835.63 r0 top (schematic designator R11)
R11.C "ON1" R0805M 6619.77,7833.7 r0 top (schematic designator R11)
R11.D "ON1" R0805M 8094.69,7888.7 r0 top (schematic designator R11)
R11.E "ON1" R0805M 9969.77,7888.7 r0 top (schematic designator R11)
R12.A "ISENSE" R0805M 3716.18,7787.13 r270 top (schematic designator R12)
R12.B "ISENSE" R0805M 4619.53,7785.63 r270 top (schematic designator R12)
R12.C "ISENSE" R0805M 6444.76,7783.7 r270 top (schematic designator R12)
R12.D "ISENSE" R0805M 7919.68,7838.7 r270 top (schematic designator R12)
R12.E "ISENSE" R0805M 9794.76,7838.7 r270 top (schematic designator R12)
R13.A "RON" R0805M 3831.18,8312.13 r180 top (schematic designator R13)
R13.B "RON" R0805M 5204.53,8310.63 r180 top (schematic designator R13)
R13.C "RON" R0805M 6579.76,8308.7 r180 top (schematic designator R13)
R13.D "RON" R0805M 7956.14,8311.77 r180 top (schematic designator R13)
R13.E "RON" R0805M 9329.76,8313.7 r180 top (schematic designator R13)
R14.A "RFBT" R0805M 4181.18,8137.13 r90 top (schematic designator R14)
R14.B "RFBT" R0805M 5554.53,8135.63 r90 top (schematic designator R14)
R14.C "RFBT" R0805M 6929.76,8133.7 r90 top (schematic designator R14)
R14.D "RFBT" R0805M 8306.14,8136.77 r90 top (schematic designator R14)
R14.E "RFBT" R0805M 9679.76,8138.7 r90 top (schematic designator R14)
R15.A "RENT" R0805M 3781.18,8137.13 r90 top (schematic designator R15)
R15.B "RENT" R0805M 5154.53,8135.63 r90 top (schematic designator R15)
R15.C "RENT" R0805M 6529.76,8133.7 r90 top (schematic designator R15)
R15.D "RENT" R0805M 7906.14,8136.77 r90 top (schematic designator R15)
R15.E "RENT" R0805M 9279.76,8138.7 r90 top (schematic designator R15)
R16.A "RFBB" R0805M 4031.18,8112.13 r0 top (schematic designator R16)
R16.B "RFBB" R0805M 5404.53,8110.63 r0 top (schematic designator R16)
R16.C "RFBB" R0805M 6779.77,8108.7 r0 top (schematic designator R16)
R16.D "RFBB" R0805M 8156.14,8111.77 r0 top (schematic designator R16)
R16.E "RFBB" R0805M 9529.77,8113.7 r0 top (schematic designator R16)
R17.A "RFBB" R0805M 4031.18,8212.13 r0 top (schematic designator R17)
R17.B "RFBB" R0805M 5404.53,8210.63 r0 top (schematic designator R17)
R17.C "RFBB" R0805M 6779.77,8208.7 r0 top (schematic designator R17)
R17.D "RFBB" R0805M 8156.14,8211.77 r0 top (schematic designator R17)
R17.E "RFBB" R0805M 9529.77,8213.7 r0 top (schematic designator R17)
R18.A "RENB" R0805M 3881.18,8137.13 r270 top (schematic designator R18)
R18.B "RENB" R0805M 5254.53,8135.63 r270 top (schematic designator R18)
R18.C "RENB" R0805M 6629.76,8133.7 r270 top (schematic designator R18)
R18.D "RENB" R0805M 8006.14,8136.77 r270 top (schematic designator R18)
R18.E "RENB" R0805M 9379.76,8138.7 r270 top (schematic designator R18)
R19 "" R0402M 9287.01,7791.69 r0 top
R20 "" R0402M 7359.69,7808.7 r0 top
R21 "" R0402M 9387.01,7791.69 r0 top
R22 "" R0402M 9487.01,7791.69 r180 top
R23 "" R0402M 7459.69,7808.7 r0 top
R24 "" R0402M 7559.69,7808.7 r180 top
R25 "" R0402M 5969.69,7768.7 r0 top
R26 "" R0402M 5519.69,7768.7 r0 top
R27 "" R0402M 6069.69,7768.7 r0 top
R28 "" R0402M 6169.69,7768.7 r180 top
R29 "" R0402M 5619.69,7768.7 r0 top
R30 "" R0402M 5719.69,7768.7 r180 top
R31 "" R0402M 5268.5,6708.07 r270 top
R32 "" R0402M 7159.45,6758.7 r270 top
R33 "" R0402M 7003.39,6903.74 r180 top
R34 "" R0402M 7003.39,6963.74 r180 top
R35 "VSET_1" R0805M 9067.01,7451.69 r0 top
R36 "VSET_1" R0805M 9067.01,7371.69 r0 top
R37 "VSET_1" R0805M 9067.01,7531.69 r0 top
R38 "VSET_1" R0805M 9067.01,7611.69 r0 top
R39 "VSET_1" R0805M 9067.01,7691.69 r0 top
R40 "VSET_1" R0805M 9067.01,7771.69 r0 top
R41 "VSET_1" R0805M 9067.01,7851.69 r0 top
R42 "VSET_1" R0805M 9067.01,7931.69 r0 top
R43 "" R0402M 8651.82,6780.12 r270 top
R44.A "" R0805M 4241.18,7187.13 r270 top (schematic designator R44)
R44.B "" R0805M 5144.53,7185.63 r270 top (schematic designator R44)
R44.C "" R0805M 6969.76,7183.7 r270 top (schematic designator R44)
R44.D "" R0805M 8444.68,7238.7 r270 top (schematic designator R44)
R44.E "" R0805M 10319.69,7238.7 r270 top (schematic designator R44)
R45.A "" R0805M 3941.18,7189.72 r270 top (schematic designator R45)
R45.B "" R0805M 4844.53,7188.23 r270 top (schematic designator R45)
R45.C "" R0805M 6669.76,7186.3 r270 top (schematic designator R45)
R45.D "" R0805M 8144.68,7241.3 r270 top (schematic designator R45)
R45.E "" R0805M 10019.76,7241.3 r270 top (schematic designator R45)
R46 "Res3" RESC1005X06L 5738.27,3453.86 r0 top
R47 "Res3" RESC1005X06L 5738.27,3493.23 r0 top
R48 "Res3" RESC1005X06L 5738.27,3050.32 r0 top
R49 "Res3" RESC1005X06L 5738.27,3089.69 r0 top
R50 "Res3" RESC1005X06L 2815.04,2538.5 r90 top
R51 "Res3" RESC1005X06L 2748.11,4035.55 r0 top
R52 "Res3" RESC1005X06L 5738.27,2863.31 r0 top
R53 "Res3" RESC1005X06L 5738.27,2804.25 r0 top
R54 "Res3" RESC1005X06L 5738.27,2745.2 r0 top
R55 "Res3" RESC1005X06L 5738.27,2686.14 r0 top
R56 "Res3" RESC1005X06L 5738.27,2627.09 r0 top
R57 "Res3" RESC1005X06L 5738.27,2568.03 r0 top
R58 "Res3" RESC1005X06L 5738.27,2508.98 r0 top
R59 "Res3" RESC1005X06L 5738.27,2449.92 r0 top
R60 "Res3" RESC1005X06L 5331.77,2209.76 r180 top
R101 "Res3" RESC1005X06L 4616.22,2253.07 r270 top
R102 "Res3" RESC1005X06L 5108.35,2213.7 r270 top
R103 "Res3" RESC1005X06L 2748.11,4074.92 r0 top
R104 "Res3" RESC1005X06L 2748.11,4114.29 r0 top
R201 "Res3" RESC1005X06L 3563.07,3847.56 r180 top
R202 "Res3" RESC1005X06L 3563.07,3709.76 r180 top
R211.A "Res3" RESC1005X06L 4881.97,4398.74 r0 top (schematic designator R211)
R211.B "Res3" RESC1005X06L 4881.97,3886.93 r0 top (schematic designator R211)
R212.A "Res3" RESC1005X06L 4881.97,4438.11 r0 top (schematic designator R212)
R212.B "Res3" RESC1005X06L 4881.97,3926.3 r0 top (schematic designator R212)
R221.A "Res3" RESC1005X06L 4108.35,4418.43 r180 top (schematic designator R221)
R221.B "Res3" RESC1005X06L 4108.35,3985.35 r180 top (schematic designator R221)
R222.A "Res3" RESC1005X06L 4108.35,4260.94 r180 top (schematic designator R222)
R222.B "Res3" RESC1005X06L 4108.35,3827.87 r180 top (schematic designator R222)
R223.A "Res3" RESC1005X06L 4108.35,4379.06 r0 top (schematic designator R223)
R223.B "Res3" RESC1005X06L 4108.35,3945.98 r0 top (schematic designator R223)
R231 "Res3" RESC1005X06L 5354.41,3945.98 r180 top
R232 "Res3" RESC1005X06L 5354.41,4280.63 r180 top
R233 "Res3" RESC1005X06L 5354.41,4615.28 r180 top
R234 "Res3" RESC1005X06L 5354.41,4654.65 r0 top
S1 "MLL1300S" MILL1300S 2933.15,2008.98 r0 top
S2 "SW-DIP4" PCBComponent_1 5590.63,3272.17 r270 top
S3 "KS2A" K5A2 2539.45,2597.56 r90 top
U1.A "LMZ14201H" TO-PMOD-7 4671.18,8762.13 r0 top (schematic designator U1)
U1.B "LMZ14201H" TO-PMOD-7 6044.53,8760.63 r0 top (schematic designator U1)
U1.C "LMZ14201H" TO-PMOD-7 7419.76,8758.7 r0 top (schematic designator U1)
U1.D "LMZ14201H" TO-PMOD-7 8796.14,8761.77 r0 top (schematic designator U1)
U1.E "LMZ14201H" TO-PMOD-7 10169.76,8763.7 r0 top (schematic designator U1)
U2.A "LTC4225" SSOP24 4091.18,7512.13 r270 top (schematic designator U2)
U2.B "LTC4225" SSOP24 4994.53,7510.63 r270 top (schematic designator U2)
U2.C "LTC4225" SSOP24 6819.77,7508.7 r270 top (schematic designator U2)
U2.D "LTC4225" SSOP24 8294.68,7563.7 r270 top (schematic designator U2)
U2.E "LTC4225" SSOP24 10169.77,7563.7 r270 top (schematic designator U2)
U3.A "LMZ14201H" TO-PMOD-7 3981.18,8762.13 r0 top (schematic designator U3)
U3.B "LMZ14201H" TO-PMOD-7 5354.53,8760.63 r0 top (schematic designator U3)
U3.C "LMZ14201H" TO-PMOD-7 6729.76,8758.7 r0 top (schematic designator U3)
U3.D "LMZ14201H" TO-PMOD-7 8106.14,8761.77 r0 top (schematic designator U3)
U3.E "LMZ14201H" TO-PMOD-7 9479.76,8763.7 r0 top (schematic designator U3)
U4 "VND5E025AK-E" SSO24 9449.69,7478.7 r270 top
U5 "VND5E025AK-E" SSO24 7519.69,7488.7 r270 top
U6 "VND5E025AK-E" SSO24 6129.69,7448.7 r270 top
U7 "VND5E025AK-E" SSO24 5679.69,7448.7 r270 top
U8 "MCP23017" SSOP28 5520.63,6889.65 r0 top
U9 "MCP23017" SSOP28 7419.45,6938.7 r0 top
U10 "LTC1477" SO8 4728.19,6873.86 r270 top
U11 "LTC1477" SO8 4245.71,6868.7 r270 top
U12 "MCP23017" SSOP28 8911.82,6960.12 r0 top
U13 "MIC5200" SOT230P710X170-4L 2500.08,3778.66 r180 top
U101 "LPC2468FBD208" TSQFP50P3000X3000X160-208L 4586.69,2922.36 r90 top
U102 "CY62167DV30LL" TSSOP50P2000X120-48L 3366.22,3178.27 r0 top
U103 "FM22L16-55-TG" TSOP80P1180X120-44L 3366.22,2568.03 r180 top
U201 "AT27LV512A" PLCC7*9 3270.75,4290.47 r90 top
U202 "IttyBitty Timer" SOT23-5 3425.28,3847.56 r0 top
U203 "CD4520BPW" TSSOP16 3090.63,3729.45 r90 top
U204 "IttyBitty Timer" SOT23-5 3425.28,3690.08 r0 top
U211.A "MX614TN" SOIC16 4547.32,4379.06 r180 top (schematic designator U211)
U211.B "MX614TN" SOIC16 4547.32,3867.24 r180 top (schematic designator U211)
U221.A "MT88L70AN" TSSOP20 3838.66,4457.8 r90 top (schematic designator U221)
U221.B "MT88L70AN" TSSOP20 3838.66,4024.72 r90 top (schematic designator U221)
U231 "CD4053BCM" TSSOP16 5236.3,3808.19 r90 top
U232 "CD4053BCM" TSSOP16 5236.3,4142.83 r90 top
U233 "CD4051BCM" TSSOP16 5236.3,4477.48 r90 top
X101 "Crystal Oscilator" 7M 4970.55,2213.7 r270 top
X102 "Crystal Oscilator" "9H T10" 4754.02,2223.54 r180 top
X211.A "ECS-2025-035" ECS-2025 4901.65,4260.94 r270 top (schematic designator X211)
X211.B "ECS-2025-035" ECS-2025 4901.65,3749.13 r270 top (schematic designator X211)
X221.A "ECS-2025-035" ECS-2025 4147.72,4575.91 r180 top (schematic designator X221)
X221.B "ECS-2025-035" ECS-2025 4147.72,4142.83 r180 top (schematic designator X221)

## Footprints (in the part's own frame and the unit in brackets; to place one, negate y for a bottom-side part, rotate by r counter-clockwise, add the part's x,y. Pads: shape width x height; smd on the part's side, far side on the other; paste and mask are expansions set on the pad)
7M [mm]
  rect 1.4x1.2 smd: 1(-1.1,-0.85) 2(1.1,0.85) 3(-1.1,0.85) 3(1.1,-0.85)
  silkscreen extent -2,-1.75 2,1.75, body extent -1.6,-1.25 1.6,1.25, height 0.75
"9H T10" [mm]
  rect 1x1.8 smd: 1(-1.25,0) 2(1.25,0)
  silkscreen extent -2,-1.25 2,1.25, body extent -1.6,-0.75 1.6,0.75, height 0.75
ASMT-Rx45 [mm]
  rect 0.8x0.8 smd: 1(-0.75,0) 2(0.75,0)
  silkscreen extent -2.25,-0.75 1.5,0.75, body extent -0.8,-0.4 0.8,0.4, height 0.45
CAPC1005X06L [mm] "Chip Capacitor, 2-Leads, Body 1.0x0.5mm, IPC High Density"
  rect 0.5x0.6 smd: 1(-0.45,0) 2(0.45,0)
  silkscreen extent -1,-0.5 1,0.5, body extent -0.53,-0.28 0.53,0.27, height 0.55
ECS-2025 [mm] "SMD Clock Oscillator"
  rect 1.1x0.9 smd: 1(-0.9,-0.7) 2(0.9,-0.7) 3(0.9,0.7) 4(-0.9,0.7)
  silkscreen extent -2,-1.5 2,1.5, body extent -1.25,-1 1.25,1, height 0.9
"FTDI BASIC" [mm]
  rect 1.5x1.5 hole 0.9: 1(10.25,6.35)
  round 1.5 hole 0.9: 2(10.25,3.81) 3(10.25,1.27) 4(10.25,-1.27) 5(10.25,-3.81) 6(10.25,-6.35)
  silkscreen extent 0,-8.5 12.5,8.5, body extent -0.02,-7.62 10.55,7.62, height 2.51
FTSH-105-01-L-DV-TR [mil] "http://www.samtec.com/ftppub/cpdf/FTSHMKT1.PDF"
  rect 29x110 smd: 1(-100,-80) 2(-100,80) 3(-50,-80) 4(-50,80) 5(0,-80) 6(0,80) 7(50,-80) 8(50,80) 9(100,-80) 10(100,80)
  silkscreen extent -157,-157 157,157, body extent -125,-115 125,115, height 234
HDR1X2 [mm] "Connector; Header; 2 Position"
  rect 1.5x1.5 hole 0.9: 1(0,0)
  round 1.5 hole 0.9: 2(2.54,0)
  silkscreen extent -1.27,-1.27 3.81,1.27
HDR2X8 [mm] "Connector; Header; 8x2 Position"
  rect 1.5x1.5 hole 0.9: 1(0,0)
  round 1.5 hole 0.9: 2(0,2.54) 3(2.54,0) 4(2.54,2.54) 5(5.08,0) 6(5.08,2.54) 7(7.62,0) 8(7.62,2.54) 9(10.16,0) 10(10.16,2.54) 11(12.7,0) 12(12.7,2.54) 13(15.24,0) 14(15.24,2.54) 15(17.78,0) 16(17.78,2.54)
  silkscreen extent -1.27,-1.27 19.05,3.81
HDR2X12 [mm] "Connector; Header; 12x2 Position"
  rect 1.5x1.5 hole 0.9: 1(0,0)
  round 1.5 hole 0.9: 2(0,2.54) 3(2.54,0) 4(2.54,2.54) 5(5.08,0) 6(5.08,2.54) 7(7.62,0) 8(7.62,2.54) 9(10.16,0) 10(10.16,2.54) 11(12.7,0) 12(12.7,2.54) 13(15.24,0) 14(15.24,2.54) 15(17.78,0) 16(17.78,2.54) 17(20.32,0) 18(20.32,2.54) 19(22.86,0) 20(22.86,2.54) 21(25.4,0) 22(25.4,2.54) 23(27.94,0) 24(27.94,2.54)
  silkscreen extent -1.27,-1.27 29.21,3.81
INDC1005X06L [mm] "Chip Inductor, 2-Leads, Body 1.0x0.5mm, IPC High Density"
  rect 0.5x0.6 smd: 1(-0.45,0) 2(0.45,0)
  silkscreen extent -1,-0.5 1,0.5, body extent -0.53,-0.28 0.53,0.27, height 0.55
J1205M [mm] "Chip Resistor, 2-Leads, Body 1.0x0.5mm, IPC Medium Density"
  rect 0.8x1.3 smd: 1(-1.109,0) 2(-0.009,0) 3(1.091,0)
  body extent -1.32,-0.51 1.35,0.51, height 0.6
K5A2 [mm]
  rect 1x1.42 smd: 0(-3.3,-2.8) 0(-3.3,2.8) 8(3.3,-2.8) 9(3.3,2.8)
  round 1.6 hole 1.2: 0(-2.875,0)
  round 1.3 hole 0.9: 0(2.875,0)
  rect 1.2x2 smd: 1(-1.8,4.5) 2(0,4.5) 3(1.8,4.5) 4(-1.8,-4.5) 5(0,-4.5) 6(1.8,-4.5)
  silkscreen extent -6,-6 6,6, body extent -4.13,-4 4.13,4, height 4.55
MILL1300S [mil]
  rect 40x32 smd: 0(-214,7) 0(-214,96) 0(214,7) 0(214,96)
  round 55.12 hole 46.46 paste+0 mask+0: 0(-99,52) 0(100,52)
  rect 36x52 smd: 1(-119,124) 2(-59,124) 3(59,124) 4(119,124)
  silkscreen extent -276,0 276,197, body extent -213,-60 213,139, height 56
PCBComponent_1 [mm]
  rect 0.76x1.27 smd: 1(-1.905,-3.81) 2(-0.635,-3.81) 3(0.635,-3.81) 4(1.905,-3.81) 5(1.905,3.81) 6(0.635,3.81) 7(-0.635,3.81) 8(-1.905,3.81)
  silkscreen extent -4,-4.75 4,4.75, body extent -3.1,-4.06 3.1,4.06, height 2.31
PLCC7*9 [mm] "PLCC, 32-Leads, Body 15.1x15.1mm (max), Pitch 1.270mm, IPC Medium Density"
  rect 0.6x2.3 smd: 1(0,7.46) 2(-1.27,7.46) 3(-2.54,7.46) 4(-3.81,7.46) 14(-3.81,-7.46) 15(-2.54,-7.46) 16(-1.27,-7.46) 17(0,-7.46) 18(1.27,-7.46) 19(2.54,-7.46) 20(3.81,-7.46) 30(3.81,7.46) 31(2.54,7.46) 32(1.27,7.46)
  rect 2.3x0.6 smd: 5(-6.19,5.08) 6(-6.19,3.81) 7(-6.19,2.54) 8(-6.19,1.27) 9(-6.19,0) 10(-6.19,-1.27) 11(-6.19,-2.54) 12(-6.19,-3.81) 13(-6.19,-5.08) 21(6.19,-5.08) 22(6.19,-3.81) 23(6.19,-2.54) 24(6.19,-1.27) 25(6.19,0) 26(6.19,1.27) 27(6.19,2.54) 28(6.19,3.81) 29(6.19,5.08)
  silkscreen extent -7.87,-9.14 7.87,9.14, body extent -6.35,-7.62 6.35,7.62, height 3.56
R0402M [mm] "Chip Resistor, 2-Leads, Body 1.0x0.5mm, IPC Medium Density"
  rect 0.8x0.7 smd: 1(-0.55,0) 2(0.55,0)
  body extent -0.55,-0.3 0.55,0.3, height 0.6
R0805M [mm] "Chip Resistor, 2-Leads, Body 2.0x1.3mm, IPC Medium Density"
  rect 1.2x1.35 smd: 1(-0.95,0) 2(0.95,0)
  silkscreen extent -0.15,-0.58 0.15,0.58, body extent -1.1,-0.67 1.1,0.67, height 0.6
R1210M [mm] "Chip Capacitor, 2-Leads, Body 3.2x2.5mm, IPC Medium Density"
  rect 1.35x2.8 smd: 1(-1.475,0) 2(1.475,0)
  silkscreen extent -0.4,-1.3 0.4,1.3, body extent -1.75,-1.4 1.75,1.4, height 1.5
RESC1005X06L [mm] "Chip Resistor, 2-Leads, Body 1.0x0.5mm, IPC High Density"
  rect 0.5x0.6 smd: 1(-0.45,0) 2(0.45,0)
  silkscreen extent -1,-0.5 1,0.5, body extent -0.53,-0.28 0.53,0.27, height 0.55
SO8 [mm]
  oval 2.2x0.6 smd: 1(-2.4,1.905) 2(-2.4,0.635) 3(-2.4,-0.635) 4(-2.4,-1.905) 5(2.4,-1.905) 6(2.4,-0.635) 7(2.4,0.635) 8(2.4,1.905)
  silkscreen extent -2.52,-2.5 0.9,2.88, body extent -2,-2.5 2,2.5, height 1.8
SOIC16 [mm] "SOIC, 16-Leads, Body 10.5x7.6mm (max), Pitch 1.27mm, IPC Medium Density"
  rect 2.35x0.6 smd: 1(-4.55,4.445) 2(-4.55,3.175) 3(-4.55,1.905) 4(-4.55,0.635) 5(-4.55,-0.635) 6(-4.55,-1.905) 7(-4.55,-3.175) 8(-4.55,-4.445) 9(4.55,-4.445) 10(4.55,-3.175) 11(4.55,-1.905) 12(4.55,-0.635) 13(4.55,0.635) 14(4.55,1.905) 15(4.55,3.175) 16(4.55,4.445)
  silkscreen extent -6,-5.5 6,5.5, body extent -3.8,-5.24 3.79,5.25, height 2.67
SOT23-5 [mm] "SOT23, 5-Leads, Body 3.0x3.0mm (max), Pitch 0.95mm, IPC Medium Density"
  rect 1.1x0.6 smd: 1(-1.2,0.95) 2(-1.2,0) 3(-1.2,-0.95) 4(1.2,-0.95) 5(1.2,0.95)
  silkscreen extent -2.5,-2 2.5,2, body extent -0.85,-1.5 0.85,1.5, height 1.45
SOT230P710X170-4L [mm] "SOT223, 4-Leads, Body 6.7x7.5mm (max), Pitch 2.30mm, IPC High Density"
  rect 2.2x0.85 smd: 1(-2.9,2.3) 2(-2.9,0) 3(-2.9,-2.3)
  rect 2.2x3.3 smd: 4(2.9,0)
  silkscreen extent -5,-4 5,4, body extent -1.86,-3.35 1.86,3.35, height 1.7
SSO24 [mm]
  oval 1.8x0.6 smd: 3(-4.75,2.8) 5(-4.75,1.2) 7(-4.75,-0.4) 9(-4.75,-2) CS1(-4.75,-1.2) CS2(-4.75,-2.8) CS_DIS(-4.75,-3.6) GND(-4.75,3.6) IN1(-4.75,0.4) IN2(-4.75,2) OUT1(4.75,-1.2) OUT1(4.75,-0.4) OUT1(4.75,-4.4) OUT1(4.75,-3.6) OUT1(4.75,-2.8) OUT1(4.75,-2) OUT2(4.75,2) OUT2(4.75,2.8) OUT2(4.75,3.6) OUT2(4.75,4.4) OUT2(4.75,0.4) OUT2(4.75,1.2) VCC(-4.75,4.4) VCC(-4.75,-4.4)
  rect 5x7.4 smd: VCC(0,0)
  silkscreen extent -4.87,-5.25 3.45,5.38, body extent -3.8,-5.25 3.8,5.25, height 2.45
SSOP24 [mm]
  oval 2.2x0.35 smd: 1(-2.4,3.492) 2(-2.4,2.857) 3(-2.4,2.222) 4(-2.4,1.587) 5(-2.4,0.952) 6(-2.4,0.317) 7(-2.4,-0.318) 8(-2.4,-0.953) 9(-2.4,-1.588) 10(-2.4,-2.223) 11(-2.4,-2.858) 12(-2.4,-3.493) 13(2.4,-3.492) 14(2.4,-2.857) 15(2.4,-2.222) 16(2.4,-1.587) 17(2.4,-0.952) 18(2.4,-0.317) 19(2.4,0.318) 20(2.4,0.953) 21(2.4,1.588) 22(2.4,2.223) 23(2.4,2.858) 24(2.4,3.493)
  silkscreen extent -2.52,-4.35 0.9,4.35, body extent -2,-4.35 2,4.35, height 1.1
SSOP28 [mm]
  oval 2.1x0.45 smd: 1(-3.45,4.225) 2(-3.45,3.575) 3(-3.45,2.925) 4(-3.45,2.275) 5(-3.45,1.625) 6(-3.45,0.975) 7(-3.45,0.325) 8(-3.45,-0.325) 9(-3.45,-0.975) 10(-3.45,-1.625) 11(-3.45,-2.275) 12(-3.45,-2.925) 13(-3.45,-3.575) 14(-3.45,-4.225) 15(3.45,-4.225) 16(3.45,-3.575) 17(3.45,-2.925) 18(3.45,-2.275) 19(3.45,-1.625) 20(3.45,-0.975) 21(3.45,-0.325) 22(3.45,0.325) 23(3.45,0.975) 24(3.45,1.625) 25(3.45,2.275) 26(3.45,2.925) 27(3.45,3.575) 28(3.45,4.225)
  silkscreen extent -3.57,-5.25 2,5.25, body extent -2.8,-5.25 2.8,5.25, height 2
TO-PMOD-7 [mm]
  rect 0.89x3.06 smd: 1(-3.81,-7.305) 2(-2.54,-7.305) 3(-1.27,-7.305) 4(0,-7.305) 5(1.27,-7.305) 6(2.54,-7.305) 7(3.81,-7.305)
  rect 5.35x8.54 smd: 4(0,0)
  silkscreen extent -5.08,-6.35 5.08,6.35, body extent -4.75,-5 4.75,6, height 5.08
TSOP80P1180X120-44L [mm] "TSOP, 44-Leads, Body 18.4x10.2mm (max), Pitch 0.80mm, IPC High Density"
  rect 0.55x1.25 smd: 1(-8.4,-5.55) 2(-7.6,-5.55) 3(-6.8,-5.55) 4(-6,-5.55) 5(-5.2,-5.55) 6(-4.4,-5.55) 7(-3.6,-5.55) 8(-2.8,-5.55) 9(-2,-5.55) 10(-1.2,-5.55) 11(-0.4,-5.55) 12(0.4,-5.55) 13(1.2,-5.55) 14(2,-5.55) 15(2.8,-5.55) 16(3.6,-5.55) 17(4.4,-5.55) 18(5.2,-5.55) 19(6,-5.55) 20(6.8,-5.55) 21(7.6,-5.55) 22(8.4,-5.55) 23(8.4,5.55) 24(7.6,5.55) 25(6.8,5.55) 26(6,5.55) 27(5.2,5.55) 28(4.4,5.55) 29(3.6,5.55) 30(2.8,5.55) 31(2,5.55) 32(1.2,5.55) 33(0.4,5.55) 34(-0.4,5.55) 35(-1.2,5.55) 36(-2,5.55) 37(-2.8,5.55) 38(-3.6,5.55) 39(-4.4,5.55) 40(-5.2,5.55) 41(-6,5.55) 42(-6.8,5.55) 43(-7.6,5.55) 44(-8.4,5.55)
  silkscreen extent -11,-7 11,7, body extent -9.21,-5.08 9.21,5.08, height 1.2
TSQFP50P3000X3000X160-208L [mm] "TSQFP, 208-Leads, Body 30.1x30.1mm (max), Pitch 0.50mm, IPC High Density"
  oval 2x0.27 smd: 1(-14.425,12.75) 2(-14.425,12.25) 3(-14.425,11.75) 4(-14.425,11.25) 5(-14.425,10.75) 6(-14.425,10.25) 7(-14.425,9.75) 8(-14.425,9.25) 9(-14.425,8.75) 10(-14.425,8.25) 11(-14.425,7.75) 12(-14.425,7.25) 13(-14.425,6.75) 14(-14.425,6.25) 15(-14.425,5.75) 16(-14.425,5.25) 17(-14.425,4.75) 18(-14.425,4.25) 19(-14.425,3.75) 20(-14.425,3.25) 21(-14.425,2.75) 22(-14.425,2.25) 23(-14.425,1.75) 24(-14.425,1.25) 25(-14.425,0.75) 26(-14.425,0.25) 27(-14.425,-0.25) 28(-14.425,-0.75) 29(-14.425,-1.25) 30(-14.425,-1.75) 31(-14.425,-2.25) 32(-14.425,-2.75) 33(-14.425,-3.25) 34(-14.425,-3.75) 35(-14.425,-4.25) 36(-14.425,-4.75) 37(-14.425,-5.25) 38(-14.425,-5.75) 39(-14.425,-6.25) 40(-14.425,-6.75) 41(-14.425,-7.25) 42(-14.425,-7.75) 43(-14.425,-8.25) 44(-14.425,-8.75) 45(-14.425,-9.25) 46(-14.425,-9.75) 47(-14.425,-10.25) 48(-14.425,-10.75) 49(-14.425,-11.25) 50(-14.425,-11.75) 51(-14.425,-12.25) 52(-14.425,-12.75) 105(14.425,-12.75) 106(14.425,-12.25) 107(14.425,-11.75) 108(14.425,-11.25) 109(14.425,-10.75) 110(14.425,-10.25) 111(14.425,-9.75) 112(14.425,-9.25) 113(14.425,-8.75) 114(14.425,-8.25) 115(14.425,-7.75) 116(14.425,-7.25) 117(14.425,-6.75) 118(14.425,-6.25) 119(14.425,-5.75) 120(14.425,-5.25) 121(14.425,-4.75) 122(14.425,-4.25) 123(14.425,-3.75) 124(14.425,-3.25) 125(14.425,-2.75) 126(14.425,-2.25) 127(14.425,-1.75) 128(14.425,-1.25) 129(14.425,-0.75) 130(14.425,-0.25) 131(14.425,0.25) 132(14.425,0.75) 133(14.425,1.25) 134(14.425,1.75) 135(14.425,2.25) 136(14.425,2.75) 137(14.425,3.25) 138(14.425,3.75) 139(14.425,4.25) 140(14.425,4.75) 141(14.425,5.25) 142(14.425,5.75) 143(14.425,6.25) 144(14.425,6.75) 145(14.425,7.25) 146(14.425,7.75) 147(14.425,8.25) 148(14.425,8.75) 149(14.425,9.25) 150(14.425,9.75) 151(14.425,10.25) 152(14.425,10.75) 153(14.425,11.25) 154(14.425,11.75) 155(14.425,12.25) 156(14.425,12.75)
  oval 0.27x2 smd: 53(-12.75,-14.425) 54(-12.25,-14.425) 55(-11.75,-14.425) 56(-11.25,-14.425) 57(-10.75,-14.425) 58(-10.25,-14.425) 59(-9.75,-14.425) 60(-9.25,-14.425) 61(-8.75,-14.425) 62(-8.25,-14.425) 63(-7.75,-14.425) 64(-7.25,-14.425) 65(-6.75,-14.425) 66(-6.25,-14.425) 67(-5.75,-14.425) 68(-5.25,-14.425) 69(-4.75,-14.425) 70(-4.25,-14.425) 71(-3.75,-14.425) 72(-3.25,-14.425) 73(-2.75,-14.425) 74(-2.25,-14.425) 75(-1.75,-14.425) 76(-1.25,-14.425) 77(-0.75,-14.425) 78(-0.25,-14.425) 79(0.25,-14.425) 80(0.75,-14.425) 81(1.25,-14.425) 82(1.75,-14.425) 83(2.25,-14.425) 84(2.75,-14.425) 85(3.25,-14.425) 86(3.75,-14.425) 87(4.25,-14.425) 88(4.75,-14.425) 89(5.25,-14.425) 90(5.75,-14.425) 91(6.25,-14.425) 92(6.75,-14.425) 93(7.25,-14.425) 94(7.75,-14.425) 95(8.25,-14.425) 96(8.75,-14.425) 97(9.25,-14.425) 98(9.75,-14.425) 99(10.25,-14.425) 100(10.75,-14.425) 101(11.25,-14.425) 102(11.75,-14.425) 103(12.25,-14.425) 104(12.75,-14.425) 157(12.75,14.425) 158(12.25,14.425) 159(11.75,14.425) 160(11.25,14.425) 161(10.75,14.425) 162(10.25,14.425) 163(9.75,14.425) 164(9.25,14.425) 165(8.75,14.425) 166(8.25,14.425) 167(7.75,14.425) 168(7.25,14.425) 169(6.75,14.425) 170(6.25,14.425) 171(5.75,14.425) 172(5.25,14.425) 173(4.75,14.425) 174(4.25,14.425) 175(3.75,14.425) 176(3.25,14.425) 177(2.75,14.425) 178(2.25,14.425) 179(1.75,14.425) 180(1.25,14.425) 181(0.75,14.425) 182(0.25,14.425) 183(-0.25,14.425) 184(-0.75,14.425) 185(-1.25,14.425) 186(-1.75,14.425) 187(-2.25,14.425) 188(-2.75,14.425) 189(-3.25,14.425) 190(-3.75,14.425) 191(-4.25,14.425) 192(-4.75,14.425) 193(-5.25,14.425) 194(-5.75,14.425) 195(-6.25,14.425) 196(-6.75,14.425) 197(-7.25,14.425) 198(-7.75,14.425) 199(-8.25,14.425) 200(-8.75,14.425) 201(-9.25,14.425) 202(-9.75,14.425) 203(-10.25,14.425) 204(-10.75,14.425) 205(-11.25,14.425) 206(-11.75,14.425) 207(-12.25,14.425) 208(-12.75,14.425)
  silkscreen extent -16,-16 16,16, body extent -14,-14 14,14, height 1.6
TSSOP8 [mm]
  oval 1.55x0.35 smd: D1(-2.875,0.975) D2(2.875,0.975) G1(-2.875,-0.975) G2(2.875,-0.975) S1(-2.875,-0.325) S1(-2.875,0.325) S2(2.875,-0.325) S2(2.875,0.325)
  silkscreen extent -3,-1.55 1.7,1.83, body extent -2.25,-1.55 2.25,1.55, height 1.2
TSSOP16 [mm] "Thin Small Outline Package"
  rect 0.35x1.6 smd: 1(-2.275,-2.8) 2(-1.625,-2.8) 3(-0.975,-2.8) 4(-0.325,-2.8) 5(0.325,-2.8) 6(0.975,-2.8) 7(1.625,-2.8) 8(2.275,-2.8) 9(2.275,2.8) 10(1.625,2.8) 11(0.975,2.8) 12(0.325,2.8) 13(-0.325,2.8) 14(-0.975,2.8) 15(-1.625,2.8) 16(-2.275,2.8)
  silkscreen extent -3,-4 3,4, body extent -2.55,-2.25 2.55,2.25, height 1.2
TSSOP20 [mm] "Thin Small Outline Package"
  rect 0.35x2.1 smd: 1(-2.9,-3.45) 2(-2.25,-3.45) 3(-1.6,-3.45) 4(-0.95,-3.45) 5(-0.3,-3.45) 6(0.35,-3.45) 7(1,-3.45) 8(1.65,-3.45) 9(2.3,-3.45) 10(2.95,-3.45) 11(2.95,3.45) 12(2.3,3.45) 13(1.65,3.45) 14(1,3.45) 15(0.35,3.45) 16(-0.3,3.45) 17(-0.95,3.45) 18(-1.6,3.45) 19(-2.25,3.45) 20(-2.9,3.45)
  silkscreen extent -4,-4.8 4.1,4.8, body extent -3.72,-2.8 3.78,2.8, height 2
TSSOP50P2000X120-48L [mm] "TSSOP, 48-Leads, Body 12.0x18.4mm (max), Pitch 0.50mm, IPC High Density"
  rect 1.35x0.25 smd: 1(-9.625,5.75) 2(-9.625,5.25) 3(-9.625,4.75) 4(-9.625,4.25) 5(-9.625,3.75) 6(-9.625,3.25) 7(-9.625,2.75) 8(-9.625,2.25) 9(-9.625,1.75) 10(-9.625,1.25) 11(-9.625,0.75) 12(-9.625,0.25) 13(-9.625,-0.25) 14(-9.625,-0.75) 15(-9.625,-1.25) 16(-9.625,-1.75) 17(-9.625,-2.25) 18(-9.625,-2.75) 19(-9.625,-3.25) 20(-9.625,-3.75) 21(-9.625,-4.25) 22(-9.625,-4.75) 23(-9.625,-5.25) 24(-9.625,-5.75) 25(9.625,-5.75) 26(9.625,-5.25) 27(9.625,-4.75) 28(9.625,-4.25) 29(9.625,-3.75) 30(9.625,-3.25) 31(9.625,-2.75) 32(9.625,-2.25) 33(9.625,-1.75) 34(9.625,-1.25) 35(9.625,-0.75) 36(9.625,-0.25) 37(9.625,0.25) 38(9.625,0.75) 39(9.625,1.25) 40(9.625,1.75) 41(9.625,2.25) 42(9.625,2.75) 43(9.625,3.25) 44(9.625,3.75) 45(9.625,4.25) 46(9.625,4.75) 47(9.625,5.25) 48(9.625,5.75)
  silkscreen extent -11,-7 11,7, body extent -9.2,-6 9.2,6, height 1.2